# EAGLE board HydroPCBedits (EAGLE 9.3.2)
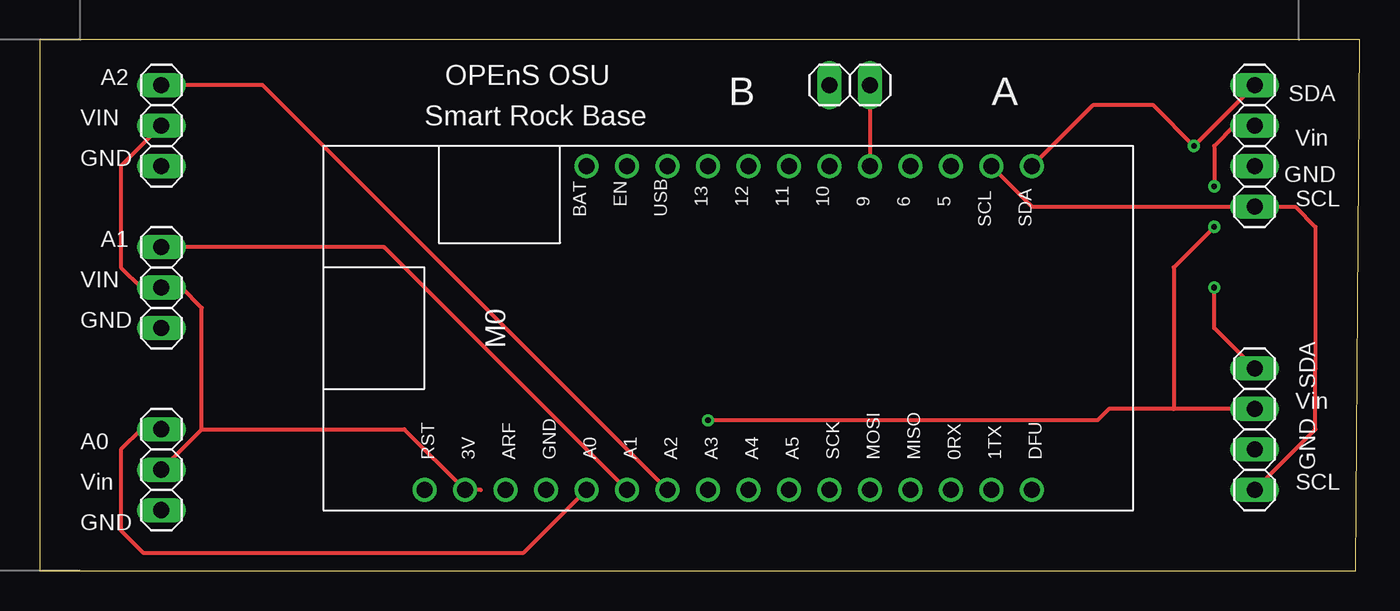
[diagram p0: board, top side]
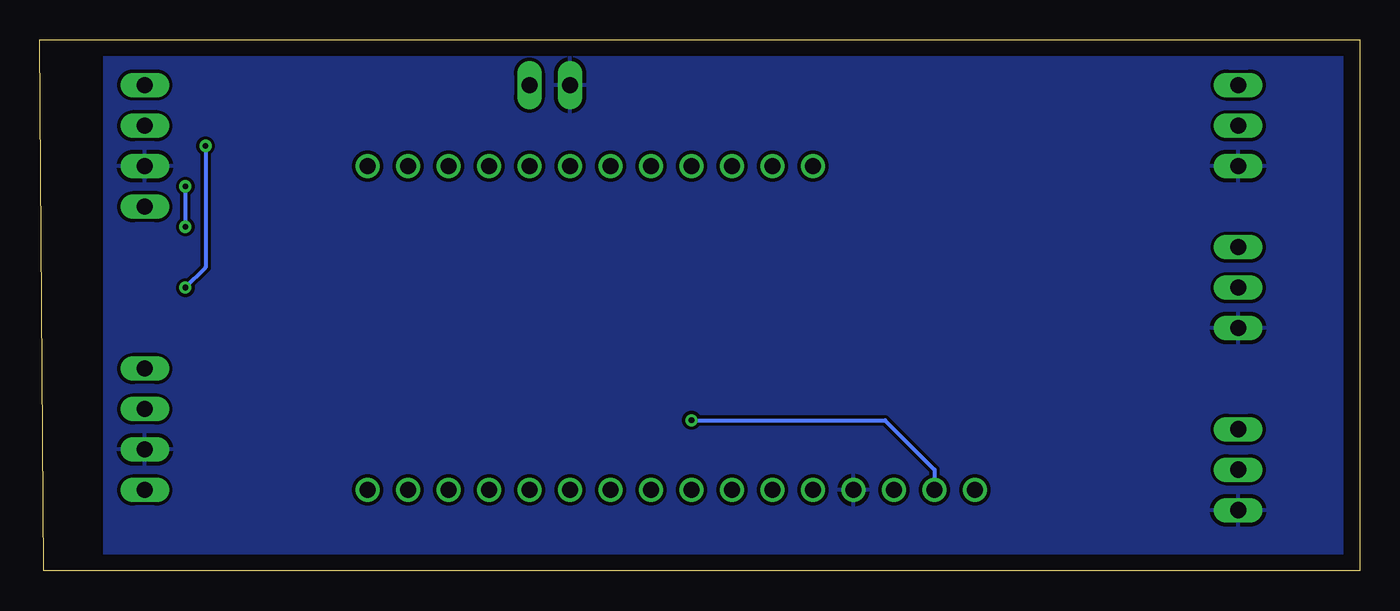
[diagram p1: board, bottom side, seen from below]

Size 82.78 x 33.33 mm. Coordinates in mm from the lower left corner, seen from the top.
Outline: 0,0 82.53,0 82.78,33.33 0,33.33 0,0
Copper layers (1*16): Top 0.035mm / dielectric 1.5mm / Bottom 0.035mm
Design rules "default *": minimum track width 6mil, minimum drill 0.35mm, track to track 6mil, track to pad 6mil, pad to pad 6mil, via to via 6mil, smd to smd 6mil, copper to edge 40mil, drill to drill 6mil, minimum pad ring 10mil, minimum via ring 8mil, stop-mask expansion 4mil, vias tented up to drill 30mil, thermal gap 10mil
Net classes: 0 default: width 0.254 mm, clearance 0.203 mm; 1 power: width 0.356 mm, clearance 0.254 mm

## Footprints (pad centres in the part's own frame; a part is rotated, then mirrored left to right if it is on the bottom)
1X03 = drill 1.016 long: 1 -2.54,0; 2 0,0; 3 2.54,0
1X04 = drill 1.016 long: 1 -3.81,0; 2 -1.27,0; 3 1.27,0; 4 3.81,0
BLUEFRUIT_MO = drill 1.016: 0RX 39.37,1.27; 1TX 41.91,1.27; 3V 8.89,1.27; 5 39.37,21.59; 6 36.83,21.59; 9 34.29,21.59; 10 31.75,21.59; 11 29.21,21.59; 12 26.67,21.59; 13 24.13,21.59; A0 16.51,1.27; A1 19.05,1.27; A2 21.59,1.27; A3 24.13,1.27; A4 26.67,1.27; A5 29.21,1.27; ARF 11.43,1.27; BAT 16.51,21.59; DFU 44.45,1.27; EN 19.05,21.59; GND 13.97,1.27; MISO 36.83,1.27; MOSI 34.29,1.27; RST 6.35,1.27; SCK 31.75,1.27; SCL 41.91,21.59; SDA 44.45,21.59; USB 21.59,21.59
1X02 = drill 1.016 long: 1 -1.27,0; 2 1.27,0

## Placement (x,y rotation side)
A0  [1X03]  7.62,6.35 90 top
A1  [1X03]  7.62,17.78 90 top
A2  [1X03]  7.62,27.94 90 top
I2C0  [1X04]  76.2,8.89 270 top
I2C1  [1X04]  76.2,26.67 270 top
M0  BLUEFRUIT_M0  [BLUEFRUIT_MO]  17.78,3.81 0 top
REED  [1X02]  50.8,30.48 180 top

## Library data of the parts
A0 A1 A2 I2C0 I2C1 REED = pinhead
M0 = bluefruit_m0

## Nets
A0: A0.3 M0.A0
A1: A1.3 M0.A1
A2: A2.3 M0.A2
EN: M0.10
GND: A0.1 A1.1 A2.1 I2C0.3 I2C1.3 M0.GND REED.2
N$2: M0.9 REED.1
SCL: I2C0.4 I2C1.4 M0.SCL
SDA: I2C0.1 I2C1.1 M0.SDA
VCC: M0.BAT
VIN: A0.2 A1.2 A2.2 I2C0.2 I2C1.2 M0.3V

## Tracks (layer width: path | path; a pad name or v marks a point on that pad's centre or on a via)
A0
  Top 0.254: A0.3 6.35,8.89 5.08,7.62 5.08,2.54 6.48,1.14 30.35,1.14 M0.A0
A1
  Top 0.254: M0.A1 21.59,20.32 A1.3
A2
  Top 0.254: M0.A2 13.97,30.48 A2.3
GND
  pour Bottom: 0,33.02 0,0 78.74,0 78.74,33.02
N$2
  Top 0.254: REED.1 M0.9
SCL
  Top 0.254: M0.SCL 62.23,22.86 I2C1.4 78.74,22.86 80.01,21.59 80.01,12.7 80.01,8.89 I2C0.4
SDA  (via drill 0.35)
  Top 0.254: M0.SDA 66.04,29.21 69.85,29.21 v72.39,26.67 I2C1.1 | I2C0.1 73.66,15.24 v73.66,17.78
  Bottom 0.254: v72.39,26.67 72.39,19.05 v73.66,17.78
VIN  (via drill 0.35)
  Top 0.254: A2.2 5.08,25.4 5.08,19.05 6.35,17.78 A1.2 8.89,17.78 10.16,16.51 10.16,8.89 | A0.2 10.16,8.89 | 10.16,8.89 22.86,8.89 M0.3V 27.66,5.08 | 71.12,10.16 71.12,19.05 v73.66,21.59 | 71.12,10.16 67.04,10.16 66.33,9.45 v41.91,9.45 41.84,9.45 | I2C1.2 74.93,27.94 73.66,26.67 v73.66,24.13 | I2C0.2 71.12,10.16
  Bottom 0.254: v41.91,9.45 29.77,9.45 26.67,6.35 M0.3V | v73.66,24.13 v73.66,21.59

## Text on the board
tNames: A2 | OPEnS OSU | SDA | B | A | VIN | Smart Rock Base | Vin | GND | GND | SCL | A1 | VIN | GND | SDA | Vin | A0 | GND | Vin | SCL | GND